# EAGLE board PCB_Sch_v8 (EAGLE 9.3.0)
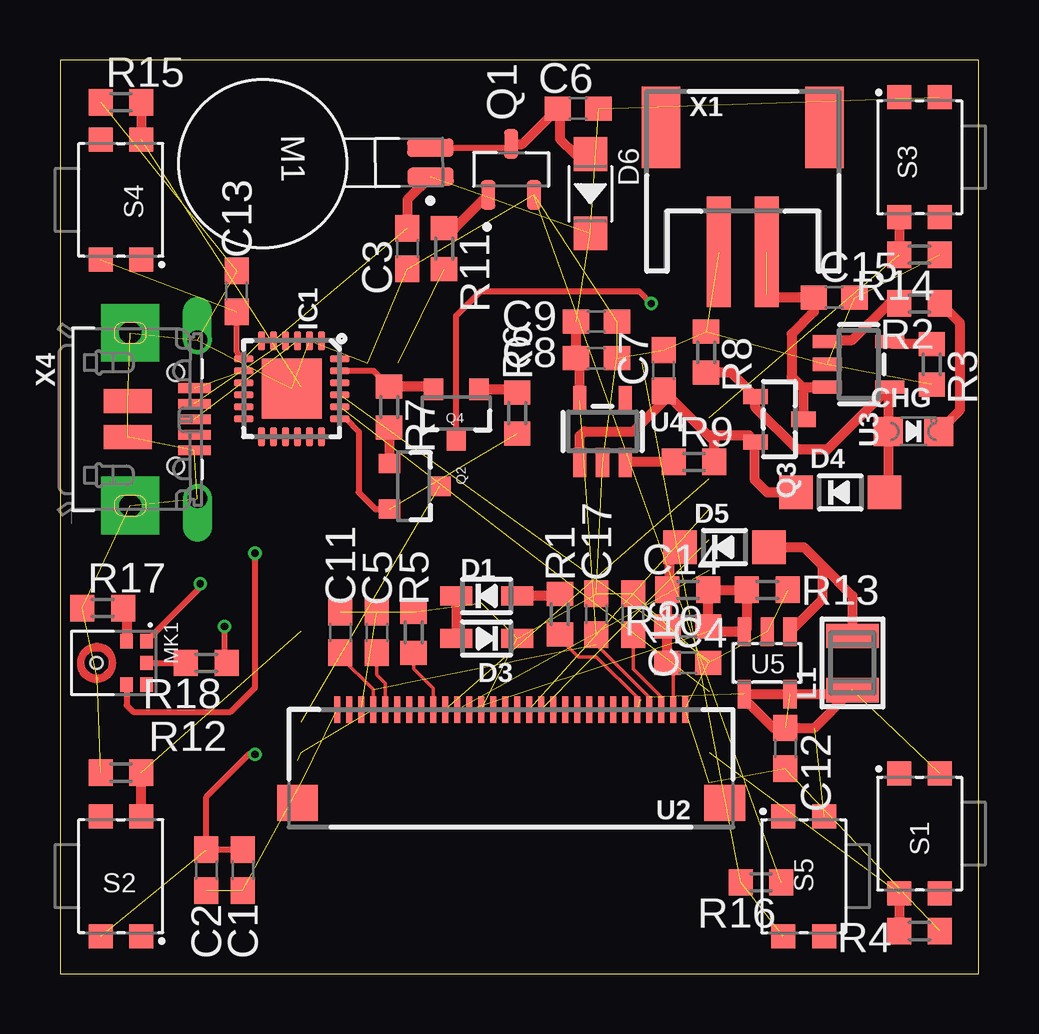
[diagram p0: board, top side]
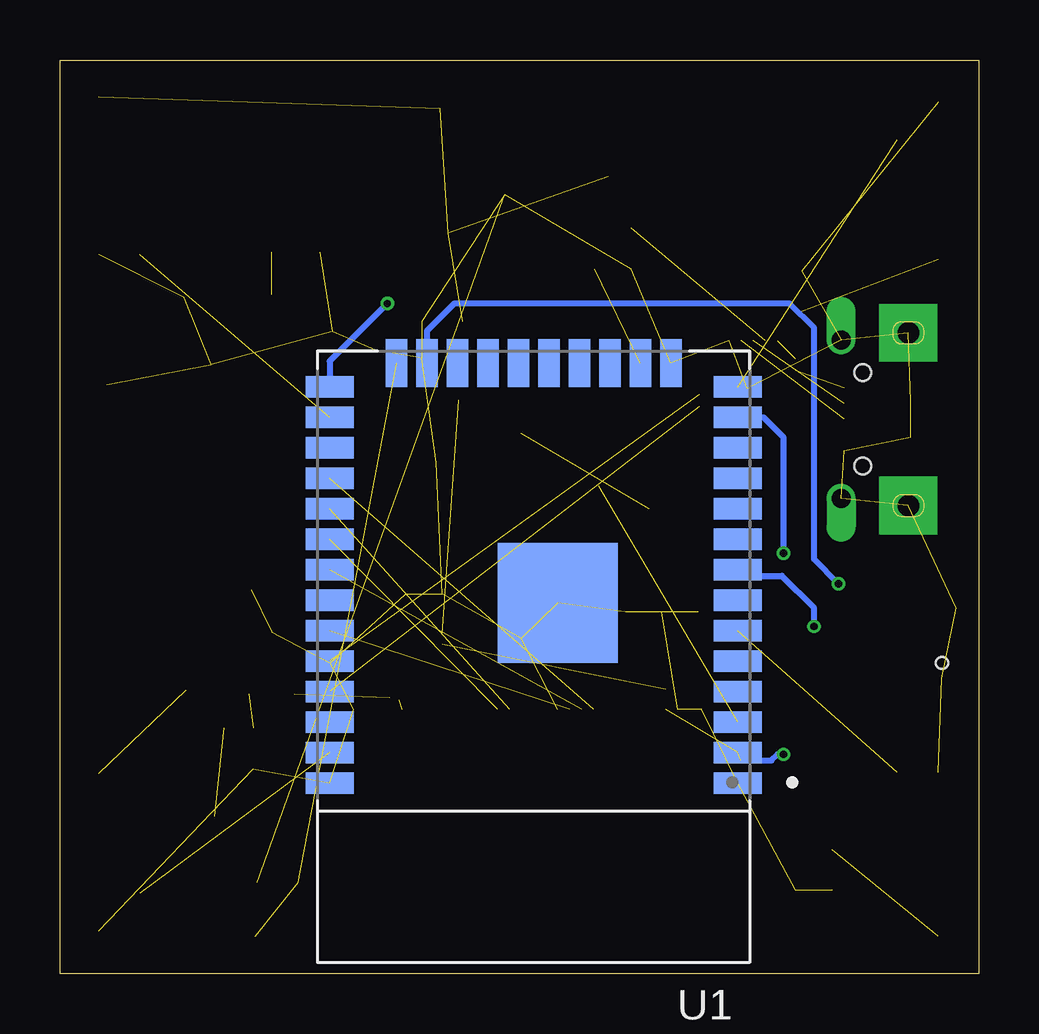
[diagram p1: board, bottom side, seen from below]

Size 38.28 x 38.09 mm. Coordinates in mm from the lower left corner, seen from the top.
Outline: 0,0 38.28,0 38.28,38.09 0,38.09 0,0
Copper layers (1*16): Top 0.035559375mm / dielectric 1.6mm / Bottom 0.035559375mm
Design rules "oshpark-2layer": minimum track width 6mil, minimum drill 10mil, track to track 6mil, track to pad 6mil, pad to pad 6mil, via to via 6mil, smd to smd 6mil, copper to edge 15mil, drill to drill 6mil, minimum pad ring 5mil, minimum via ring 5mil, stop-mask expansion 2.5mil, vias tented up to drill 0mil, thermal gap 10mil

## Footprints (pad centres in the part's own frame; a part is rotated, then mirrored left to right if it is on the bottom)
C0603 = smd 1.1 x 1: 1 -0.85,0; 2 0.85,0
CHIPLED_0805_NOOUTLINE = smd 1.2 x 1.2: A 0,-1.05; C 0,1.05
SOD-323 = smd 1.35 x 0.8: A 1.27,0; C -1.27,0
SOD-123 = smd 1.4 x 1.4: A 1.85,0; C -1.85,0
SOD-123' = smd 1.397 x 1.397: + -1.651,0; - 1.651,0
QFN24_4MM_SMSC = smd 0.8 x 0.28: 1 -2,1.25; 2 -2,0.75; 3 -2,0.25; 4 -2,-0.25; 5 -2,-0.75; 6 -2,-1.25; 13 2,-1.25; 14 2,-0.75; 15 2,-0.25; 16 2,0.25; 17 2,0.75; 18 2,1.25 | smd 0.28 x 0.8: 7 -1.25,-2; 8 -0.75,-2; 9 -0.25,-2; 10 0.25,-2; 11 0.75,-2; 12 1.25,-2; 19 1.25,2; 20 0.75,2; 21 0.25,2; 22 -0.25,2; 23 -0.75,2; 24 -1.25,2 | smd 2.5 x 2.5: THERM 0,0
INDUCTOR_1007 = smd 1.016 x 2.2: P$1 -1.127,0; P$2 1.127,0
XDCR_C0720B001F = smd 0.76 x 1.94: 1 -0.6,-5.02; 2 0.6,-5.02
MIC_SPH0645LM4H-B = smd 0.6 x 0.522: 1 -0.9,2.074; 2 -0.9,1.252; 4 0.9,1.252; 5 0.9,2.074; 6 0,2.074 | smd 0.1 x 0.1: 3 0.65,0.02 | hole 0.5: 0,0
SOT95P237X111-3N = smd 1.23 x 0.6: 1 -1.06,0.95; 2 -1.06,-0.95; 3 1.06,0
SOT23-3 = smd 0.8 x 0.9: 1 -0.95,-1; 2 0.95,-1; 3 0,1.1
SOT23-R = smd 0.635 x 1.016: 1 -0.95,-1; 2 0.95,-1; 3 0,1
R0603 = smd 1 x 1.1: 1 -0.85,0; 2 0.85,0
434333045822 = smd 1 x 1: 1 2.5,0.85; 2 2.5,-0.85; 3 -2.5,0.85; 4 -2.5,-0.85
MODULE_ESP32-WROOM-32D = smd 2 x 0.9: 1 -8.5,5.26; 2 -8.5,3.99; 3 -8.5,2.72; 4 -8.5,1.45; 5 -8.5,0.18; 6 -8.5,-1.09; 7 -8.5,-2.36; 8 -8.5,-3.63; 9 -8.5,-4.9; 10 -8.5,-6.17; 11 -8.5,-7.44; 12 -8.5,-8.71; 13 -8.5,-9.98; 14 -8.5,-11.25; 25 8.5,-11.25; 26 8.5,-9.98; 27 8.5,-8.71; 28 8.5,-7.44; 29 8.5,-6.17; 30 8.5,-4.9; 31 8.5,-3.63; 32 8.5,-2.36; 33 8.5,-1.09; 34 8.5,0.18; 35 8.5,1.45; 36 8.5,2.72; 37 8.5,3.99; 38 8.5,5.26 | smd 0.9 x 2: 15 -5.715,-12.25; 16 -4.445,-12.25; 17 -3.175,-12.25; 18 -1.905,-12.25; 19 -0.635,-12.25; 20 0.635,-12.25; 21 1.905,-12.25; 22 3.175,-12.25; 23 4.445,-12.25; 24 5.715,-12.25 | smd 5 x 5: 39 -1,-2.24
FPC_XF2M-3015-1A = smd 0.25 x 1.1: P$1 7.25,-2.63; P$2 6.75,-2.63; P$3 6.25,-2.63; P$4 5.75,-2.63; P$5 5.25,-2.63; P$6 4.75,-2.63; P$7 4.25,-2.63; P$8 3.75,-2.63; P$9 3.25,-2.63; P$10 2.75,-2.63; P$11 2.25,-2.63; P$12 1.75,-2.63; P$13 1.25,-2.63; P$14 0.75,-2.63; P$15 0.25,-2.63; P$16 -0.25,-2.63; P$17 -0.75,-2.63; P$18 -1.25,-2.63; P$19 -1.75,-2.63; P$20 -2.25,-2.63; P$21 -2.75,-2.63; P$22 -3.25,-2.63; P$23 -3.75,-2.63; P$24 -4.25,-2.63; P$25 -4.75,-2.63; P$26 -5.25,-2.63; P$27 -5.75,-2.63; P$28 -6.25,-2.63; P$29 -6.75,-2.63; P$30 -7.25,-2.63 | smd 1.7 x 1.5: SUPPORT1 8.9,1.27; SUPPORT2 -8.9,1.27
SOT23-5 = smd 0.55 x 1.2: 1 -0.95,-1.3; 2 0,-1.3; 3 0.95,-1.3; 4 0.95,1.3; 5 -0.95,1.3
SOT23-5@1 = smd 0.55 x 1.2: 1 -0.95,-1.3; 2 0,-1.3; 3 0.95,-1.3; 4 0.95,1.3; 5 -0.95,1.3
JSTPH2 = smd 1 x 4.6: 1 -1,-3.7; 2 1,-3.7 | smd 1.6 x 3.4: NC1 -3.4,1.5; NC2 3.4,1.5
4UCONN_20329_V2 = smd 1 x 2: BASE@1 -0.75,-2; BASE@2 0.75,-2 | smd 0.4 x 1.35: D+ 0,0.775; D- -0.65,0.775; GND 1.3,0.775; ID 0.65,0.775; VBUS -1.3,0.775 | drill 0.8 pad 1.143 offset: SPRT@1 -3.3,0.9; SPRT@2 3.3,0.9 | drill 0.9 pad 2.413 square: SPRT@3 -3.6,-1.9; SPRT@4 3.6,-1.9 | hole 0.7: -1.95,0; 1.95,0

## Placement (x,y rotation side)
C1  10uF  [C0603]  7.62,4.32 270 top
C2  .1uF  [C0603]  6.1,4.32 270 top
C3  10uF  [C0603]  14.48,30.23 270 top
C4  10uF/16V  [C0603]  26.16,12.95 0 top
C5  1uF  [C0603]  13.21,14.22 270 top
C6  0.1uF  [C0603]  21.59,36.07 180 top
C7  10uF  [C0603]  25.15,25.15 90 top
C8  10uF  [C0603]  22.35,25.65 0 top
C9  1uF  [C0603]  22.35,27.18 0 top
C11  10uF  [C0603]  11.68,14.22 270 top
C12  10uF  [C0603]  30.23,9.4 270 top
C13  10uF  [C0603]  7.37,28.45 90 top
C14  0.1uF  [C0603]  26.16,14.48 0 top
C15  10uF  [C0603]  32.26,28.19 0 top
C16  10uF/16V  [C0603]  23.88,14.99 270 top
C17  1uF  [C0603]  22.35,14.99 90 top
CHG  ORANGE  [CHIPLED_0805_NOOUTLINE]  35.56,22.61 270 top
D1  1N4148  [SOD-323]  17.78,15.75 0 top
D3  1N4148  [SOD-323]  17.78,13.97 180 top
D4  MBR120  [SOD-123]  32.51,20.07 0 top
D5  BAT54T1G  [SOD-123]  27.69,17.78 0 top
D6  20V-1A  [SOD-123']  22.1,32.51 270 top
IC1  CP2104  [QFN24_4MM_SMSC]  9.65,24.38 270 top
L1  10uH  [INDUCTOR_1007]  33.02,12.95 90 top
M1  C0720B001F  [XDCR_C0720B001F]  10.41,33.78 90.5 top
MK1  SPH0645LM4H-B  [MIC_SPH0645LM4H-B]  1.52,12.95 270 top
Q1  MMBT2222LT1G  [SOT95P237X111-3N]  18.8,33.53 90 top
Q2  mmbt2222  [SOT23-3]  14.73,20.32 270 top
Q3  DMG3415U  [SOT23-R]  29.97,23.11 270 top
Q4  mmbt2222  [SOT23-3]  16.51,23.37 180 top
R1  50  [R0603]  20.83,14.99 270 top
R2  1k  [R0603]  35.81,27.94 180 top
R3  4.7k  [R0603]  36.32,25.4 270 top
R4  100k  [R0603]  35.81,1.78 180 top
R5  600k  [R0603]  14.73,14.22 270 top
R6  10k  [R0603]  19.05,23.37 90 top
R7  10k  [R0603]  13.72,23.62 270 top
R8  100k  [R0603]  26.92,25.91 270 top
R9  100k  [R0603]  26.42,21.34 0 top
R10  100k  [R0603]  26.16,16 180 top
R11  1k  [R0603]  16,30.23 270 top
R12  100k  [R0603]  2.54,8.38 0 top
R13  10k  [R0603]  29.46,16 180 top
R14  100k  [R0603]  35.81,29.97 180 top
R15  100k  [R0603]  2.54,36.32 0 top
R16  100k  [R0603]  29.21,3.81 180 top
R17  10k  [R0603]  1.78,15.24 0 top
R18  68  [R0603]  6.1,12.95 180 top
S1  434333045822  [434333045822]  35.81,5.84 90 top
S2  434333045822  [434333045822]  2.54,4.06 270 top
S3  434333045822  [434333045822]  35.81,34.04 90 top
S4  434333045822  [434333045822]  2.54,32.26 270 top
S5  434333045822  [434333045822]  30.99,4.06 90 top
U1  ESP32-WROOM-32D  [MODULE_ESP32-WROOM-32D]  18.54,13.21 180 bottom
U2  UG-2828GDEDF11  [FPC_XF2M-3015-1A]  18.8,8.38 180 top
U3  MCP73831T-2ACI/OT  [SOT23-5]  33.27,25.4 270 top
U4  AP2112-3.3  [SOT23-5]  22.61,22.61 0 top
U5  FAN5331SX  [SOT23-5@1]  29.46,12.95 180 top
X1  JSTPH  [JSTPH2]  28.45,33.78 0 top
X4  20329  [4UCONN_20329_V2]  4.83,23.11 270 top

## Library data of the parts
C1-C9 C11-C17 = rcl; SPICEPREFIX: C
CHG D1 D3-D5 IC1 L1 Q3 U3-U5 X1 X4 = microbuilder
D6 = OPL_Discrete_Semiconductor; MPN: B5819W
M1 = C0720B001F; AVAILABILITY: Unavailable; DESCRIPTION: Vibration Motor Coin 3v Flex; MF: Jinlong Machinery; MP: C0720B001F; PACKAGE: Jinlong Machinery &amp; Electronics; PRICE: None
MK1 = SPH0645LM4H-B; AVAILABILITY: Unavailable; DESCRIPTION: Mic Mems Digital I2s Omni -26db; MF: Knowles; MP: SPH0645LM4H-B; PACKAGE: SIP-7 Bourns; PRICE: None
Q1 = MMBT2222LT1G
Q2 Q4 = SparkFun
R1-R18 = rcl; SPICEPREFIX: R
S1-S5 = 434333045822; AVAILABILITY: Unavailable; DESCRIPTION: Tact Switch 3.5x4.7mm Black Side push; MF: Wurth Electronics; MP: 434333045822; PACKAGE: None; PRICE: None
U1 = ESP32-WROOM-32D; AVAILABILITY: Unavailable; DESCRIPTION: IC: SoC; GPIO, I2C, I2S, IR, SD, SDIO, SPI, UART; 2.7÷3.6VDC; 20dBm; MF: Espressif Systems; MP: ESP32-WROOM-32D; PACKAGE: Module Espressif Systems; PRICE: None
U2 = microbuilder; SPICEPREFIX: X

## Nets
3.3V: C1.1 C2.1 C3.1 C6.1 C8.1 C9.1 C11.2 C12.1 C13.1 C17.1 D6.- IC1.5 IC1.6 IC1.7 L1.P$1 M1.1 S1.2 S2.2 S3.2 S4.2 S5.2 U1.2 U2.P$4 U2.P$27 U4.5 U5.4 U5.5
13V: C4.1 C14.1 D5.C R10.2 U2.P$29
BTN_LL: R12.2 S2.3 U1.6
BTN_LR: R4.2 S1.3 U1.37
BTN_UL: R15.2 S4.3 U1.14
BTN_UR: R14.2 S3.3 U1.26
BTN_WRIST: R16.2 S5.3 U1.24
DTR: IC1.23 Q4.2 R7.1
GND: C1.2 C2.2 C3.2 C4.2 C5.1 C7.2 C8.2 C9.2 C11.1 C12.2 C13.2 C15.2 C16.1 C17.2 D3.C IC1.2 IC1.THERM MK1.3 Q1.2 R3.2 R4.1 R5.1 R8.1 R12.1 R13.1 R14.1 R15.1 R16.1 R17.1 U1.1 U1.15 U1.38 U1.39 U2.P$1 U2.P$3 U2.P$13 U2.P$30 U3.2 U4.2 U5.2 X1.1 X4.BASE@1 X4.BASE@2 X4.GND X4.SPRT@1 X4.SPRT@2 X4.SPRT@3 X4.SPRT@4
GPIO0: Q4.3 U1.25
I2S_BCLK: MK1.4 U1.13
I2S_DOUT: R18.1 U1.8
I2S_LRCLK: MK1.1 U1.23
MOTOR: R11.2 U1.16
N$1: IC1.3 X4.D+
N$2: Q1.1 R11.1
N$3: C5.2 U2.P$5
N$4: MK1.2 R17.2
N$5: IC1.4 X4.D-
N$6: D1.A R1.1
N$7: R1.2 U2.P$26
N$8: Q2.1 R7.2
N$9: Q4.1 R6.2
N$10: CHG.C R2.1
N$11: D1.C D3.A
N$12: C7.1 D4.C Q3.2 R9.2 U4.1
N$13: D5.A L1.P$2 U5.1
N$14: R9.1 U4.3
N$15: R2.2 U3.1
N$16: C14.2 R10.1 R13.2 U5.3
N$17: R3.1 U3.5
N$18: C16.2 U2.P$28
N$19: R5.2 U2.P$9
N$20: C6.2 D6.+ M1.2 Q1.3
N$21: MK1.5
N$22: MK1.6 R18.2
OLED_BS0: U2.P$14
OLED_CS: U1.33 U2.P$12
OLED_DC: U1.31 U2.P$11
OLED_MOSI: U1.30 U2.P$18
OLED_RES: U1.28 U2.P$10
OLED_SCK: U1.29 U2.P$17
RESET: Q2.3 U1.3
RTS: IC1.19 Q2.2 R6.1
RXD0: IC1.21 U1.34
TXD0: IC1.20 U1.35
VBAT: C15.1 Q3.3 U3.3 X1.2
VBUS: CHG.A D4.A Q3.1 R8.2 U3.4
VBUS1: IC1.8 X4.VBUS

## Tracks (layer width: path | path; a pad name or v marks a point on that pad's centre or on a via)
3.3V  (via drill 0.3)  (16 unrouted)
  Top 0.152: U2.P$4 13.05,11.85 11.68,13.21 C11.2 | U2.P$27 24.55,11.52 22.35,13.72 C17.1
  Top 0.254: C2.1 6.26,5.33 | v8.13,9.14 7.87,9.14 6.1,7.37 C2.1 | C1.1 C2.1 | IC1.7 7.37,25.92 C13.1 | IC1.5 IC1.6
  Top 0.406: 32.85,11.65 U5.4 28.51,11.45 29.72,10.25 C12.1 31.44,10.25 32.85,11.65 | 32.85,11.65 L1.P$1 | M1.1 14.48,32.27 C3.1 | U4.5 21.66,25.5 C8.1 C9.1
  Bottom 0.254: 9.91,8.89 8.64,8.89 8.38,9.14 v8.13,9.14
13V
  Top 0.152: U2.P$29 25.55,12.72 C4.1
  Top 0.406: C4.1 C14.1 R10.2 25.4,16.09 25.4,17.34 D5.C
BTN_LL  (1 unrouted)
  Top 0.406: S2.3 R12.2
BTN_LR  (1 unrouted)
  Top 0.406: S1.3 R4.2
BTN_UL  (1 unrouted)
  Top 0.406: R15.2 S4.3
BTN_UR  (1 unrouted)
  Top 0.406: S3.3 R14.2
BTN_WRIST  (2 unrouted)
DTR
  Top 0.254: 13.72,24.38 R7.1 13.05,25.13 IC1.23
  Top 0.406: Q4.2 15.46,24.47 R7.1
GND  (47 unrouted)
GPIO0  (via drill 0.3)
  Top 0.254: Q4.3 16.51,27.43 17.53,28.45 24.13,28.45 v24.64,27.94
  Bottom 0.254: v24.64,27.94 27.04,25.54 U1.25
I2S_BCLK  (via drill 0.3)
  Top 0.254: MK1.4 2.78,11.19 3.05,10.92 7.11,10.92 8.13,11.94 v8.13,17.53
  Bottom 0.254: v8.13,17.53 8.13,22.35 8.96,23.19 U1.13
I2S_DOUT  (via drill 0.3)
  Top 0.254: R18.1 6.86,13.04 v6.86,14.48
  Bottom 0.254: v6.86,14.48 6.86,15.24 8.2,16.58 9.79,16.58 U1.8
I2S_LRCLK  (via drill 0.3)
  Top 0.254: MK1.1 5.84,16.1 v5.84,16.26
  Bottom 0.254: v5.84,16.26 6.86,17.27 6.86,26.92 7.87,27.94 21.84,27.94 22.99,26.8 U1.23
MOTOR  (1 unrouted)
N$1  (1 unrouted)
N$2
  Top 0.406: Q1.1 16.45,31.08 R11.1
N$3
  Top 0.152: U2.P$5 13.55,12.11 13.21,12.45 C5.2
N$4
  Top 0.152: 2.63,14 MK1.2
  Top 0.406: R17.2 2.78,15.09 MK1.2
N$5  (1 unrouted)
N$6
  Top 0.406: R1.1 20.74,15.75 D1.A
N$7  (1 unrouted)
  Top 0.152: 24.15,11.4 22.35,13.21 21.59,13.21 20.83,13.97 R1.2
N$8
  Top 0.406: Q2.1 13.73,22.76 R7.2
N$9
  Top 0.406: Q4.1 18.9,24.37 R6.2
N$10
  Top 0.406: R2.1 36.69,27.94 37.48,27.15 37.48,23.48 CHG.C
N$11
  Top 0.406: D1.C D3.A
N$12
  Top 0.406: R9.2 27.27,22.18 27.01,22.43 | 27.01,22.43 C7.1 25.15,23.88 23.88,22.61 21.84,22.61 21.66,22.42 U4.1 | D4.C 29.46,20.07 28.96,20.57 28.96,22.15 Q3.2 28.7,22.43 27.01,22.43
N$13
  Top 0.406: D5.A 30.99,17.78 31.75,17.02 | U5.1 31.75,15.59 31.75,17.02 | 31.75,17.02 33.02,15.75 L1.P$2
N$14
  Top 0.406: R9.1 23.59,21.34 U4.3
N$15
  Top 0.406: U3.1 32.04,26.42 33.02,26.42 34.54,27.94 R2.2
N$16
  Top 0.406: C14.2 R10.1 R13.2 28.61,14.35 U5.3 27.24,14.25 C14.2
N$17
  Top 0.406: R3.1 34.67,26.25 U3.5
N$18
  Top 0.152: U2.P$28 25.05,11.53 23.88,12.7 C16.2
N$19
  Top 0.152: U2.P$9 15.55,11.89 14.73,12.7 R5.2
N$20
  Top 0.254: M1.2 18.63,34.43 Q1.3
  Top 0.406: Q1.3 19.26,34.59 C6.2 20.83,35.98 20.83,34.8 21.46,34.16 D6.+
N$22
  Top 0.254: MK1.6 R18.2
OLED_CS  (1 unrouted)
OLED_DC  (1 unrouted)
OLED_MOSI  (1 unrouted)
OLED_RES  (1 unrouted)
OLED_SCK  (1 unrouted)
RESET  (1 unrouted)
RTS  (1 unrouted)
  Top 0.254: IC1.19 11.92,23.13 12.45,22.61 12.45,20.07 13.14,19.37 Q2.2
RXD0  (1 unrouted)
TXD0  (1 unrouted)
VBAT  (1 unrouted)
  Top 0.406: 29.45,28.3 29.56,28.19 C15.1 31.41,27.6 30.48,26.67 30.48,24.89 30.92,24.45 | 30.92,24.45 U3.3 | 30.92,24.45 30.97,24.4 Q3.3
VBUS
  Top 0.406: D4.A 34.51,20.21 CHG.A 34.51,24.39 U3.4 31.97,21.84 30.73,21.84 28.97,23.61 Q3.1 27.98,25.06 R8.2
VBUS1  (1 unrouted)